# Altium PCB ATMEGA8高仿PLC控制板.PCBDOC (part 3 of 3)
Units mm, origin at the board's own origin, x right, y up, seen from the top; angles counter-clockwise.
Board outline 152.4 x 101.6 mm, 2 copper layers (Top Layer, Bottom Layer); 72 components, 81 nets, 279 pads, 77 vias.
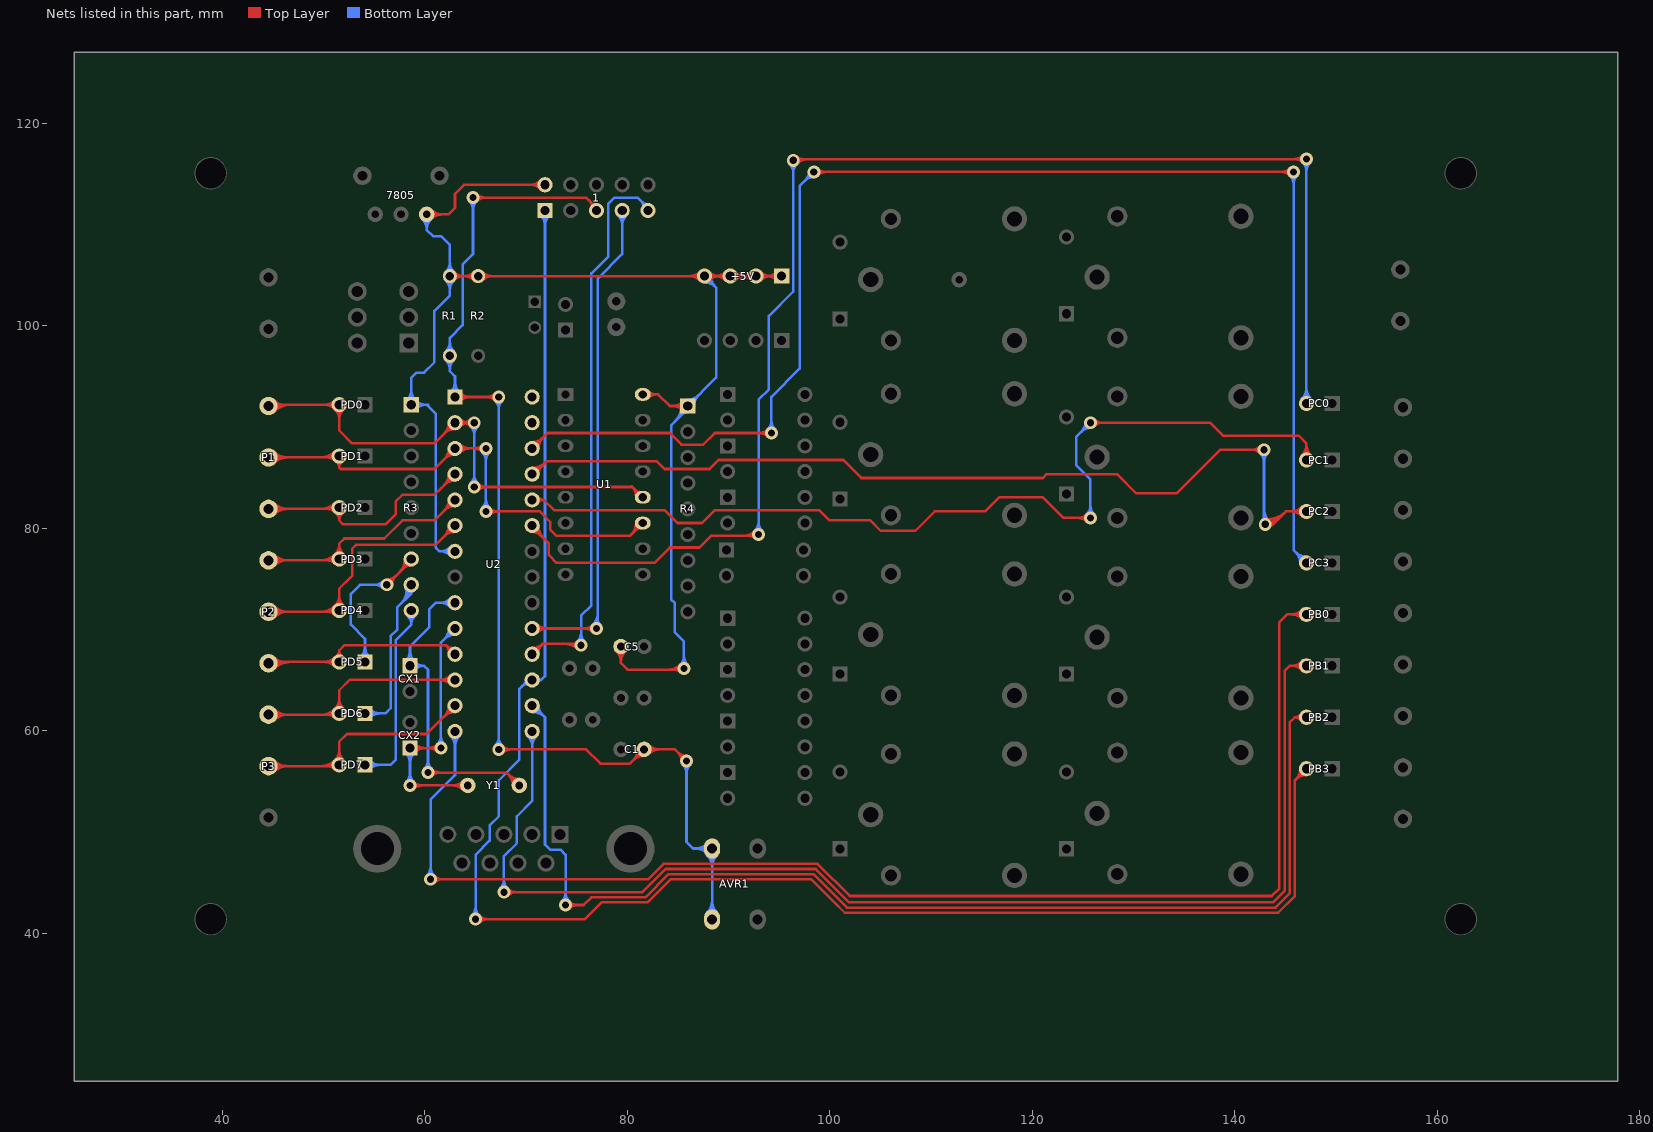
[diagram p3: the nets of this part, all layers, seen from the top]

## Via types
v1: diameter 1.27, hole 0.711, Top Layer to Bottom Layer, 77 vias

## Nets (pads, with @x,y where several pads share a name; then routed paths per layer and width w, separated by ;. In a path a pad name is that pad's centre, name@x,y a point inside that pad or via, vN(x,y) a via of type N, cw(c..) or ccw(c..) an arc to the next point about the centre after c; other vN are vias at no path point) (continued)
NetPD5_1: PD5.1 R3.7 | length 25.7
  Top Layer w0.254: v1(56.261,74.422) 58.674,76.835 R3.7@58.674,76.962 ; v1@56.261,74.93 ccw(c56.261,76.156) 57.128,75.289 ccw(c57.995,74.422) v1@56.769,74.422 ; 57.521,75.682 ccw(c56.24,76.962) R3.7@58.051,76.962 ; 57.827,75.988 cw(c58.674,75.142) R3.7@58.674,76.339 ; 57.954,76.115 ccw(c57.108,76.962) R3.7@58.305,76.962
  Bottom Layer w0.254: PD5.1@53.661,67.243 ccw(c52.598,68.306) 54.102,68.306 ccw(c55.606,68.306) PD5.1@54.543,67.243 ; PD5.1@53.841,67.063 ccw(c53.211,67.693) 54.102,67.693 ccw(c54.993,67.693) PD5.1@54.363,67.063 ; PD5.1@54.102,66.802 54.102,69.088 52.705,70.485 52.705,73.533 53.594,74.422 v1(56.261,74.422) ; v1@55.902,74.063 ccw(c55.035,73.196) 55.035,74.422 ccw(c55.035,75.648) v1@55.902,74.781
NetPD6_1: PD6.1 R3.8 | length 25.9
  Bottom Layer w0.254: PD6.1@54.102,61.722 56.134,61.722 56.642,62.23 56.642,69.342 57.277,69.977 57.277,72.18 58.674,73.577 ; PD6.1@54.363,61.461 cw(c54.993,60.831) 54.993,61.722 cw(c54.993,62.613) PD6.1@54.363,61.983 ; PD6.1@54.543,61.281 cw(c55.606,60.218) 55.606,61.722 cw(c55.606,63.226) PD6.1@54.543,62.163 ; 57.7,72.602 ccw(c56.578,73.724) R3.8@58.083,74.225 ; 57.99,72.893 ccw(c57.014,73.869) R3.8@58.324,74.305 ; 58.281,73.184 ccw(c57.45,74.014) R3.8@58.565,74.386 ; R3.8@58.49,73.827 cw(c58.412,73.577) 58.674,73.577 ; 58.572,73.474 ccw(c57.886,74.16) R3.8@58.806,74.466 ; R3.8@58.674,74.422 58.674,73.577 ; R3.8@58.858,73.827 ccw(c58.936,73.577) 58.674,73.577
NetPD7_1: PD7.1 R3.9 | length 25.7
  Bottom Layer w0.254: PD7.1@54.102,56.642 56.642,56.642 57.15,57.15 57.15,68.961 58.674,70.485 ; PD7.1@54.363,56.381 cw(c54.993,55.751) 54.993,56.642 cw(c54.993,57.533) PD7.1@54.363,56.903 ; PD7.1@54.543,56.201 cw(c55.606,55.138) 55.606,56.642 cw(c55.606,58.146) PD7.1@54.543,57.083 ; R3.9@58.258,71.418 cw(c57.419,70.485) 58.674,70.485 ; R3.9@58.427,71.607 cw(c57.931,71.055) 58.674,71.055 cw(c59.417,71.055) R3.9@58.921,71.607 ; R3.9@58.674,71.882 58.674,70.485 ; R3.9@59.09,71.418 ccw(c59.929,70.485) 58.674,70.485
PB0: PB0.2 U2.14 | length 142.3
  Top Layer w0.254: v1(60.579,45.339) 82.042,45.339 83.566,46.863 98.806,46.863 101.981,43.688 143.637,43.688 144.399,44.45 144.399,70.739 145.161,71.501 PB0.2@147.066,71.501 ; v1@60.938,44.98 cw(c61.805,44.113) 61.805,45.339 cw(c61.805,46.565) v1@60.938,45.698 ; PB0.2@146.625,71.06 ccw(c145.562,69.997) 145.562,71.501 ccw(c145.562,73.005) PB0.2@146.625,71.942 ; PB0.2@146.805,71.24 ccw(c146.175,70.61) 146.175,71.501 ccw(c146.175,72.392) PB0.2@146.805,71.762
  Bottom Layer w0.254: v1@60.22,45.698 ccw(c59.353,46.565) 60.579,46.565 ccw(c61.805,46.565) v1@60.938,45.698 ; v1(60.579,45.339) 60.579,53.213 62.992,55.626 U2.14@62.992,59.944 ; U2.14@62.551,59.503 cw(c61.488,58.44) 62.992,58.44 cw(c64.496,58.44) U2.14@63.433,59.503 ; U2.14@62.731,59.683 cw(c62.101,59.053) 62.992,59.053 cw(c63.883,59.053) U2.14@63.253,59.683
PB1: PB1.2 U2.15 | length 132.4
  Top Layer w0.254: v1(67.818,44.069) 81.49,44.069 83.776,46.355 98.596,46.355 101.898,43.053 143.764,43.053 144.907,44.196 144.907,65.913 145.415,66.421 PB1.2@147.066,66.421 ; v1@68.177,43.71 cw(c69.044,42.843) 69.044,44.069 cw(c69.044,45.295) v1@68.177,44.428 ; PB1.2@146.625,65.98 ccw(c145.562,64.917) 145.562,66.421 ccw(c145.562,67.925) PB1.2@146.625,66.862 ; PB1.2@146.805,66.16 ccw(c146.175,65.53) 146.175,66.421 ccw(c146.175,67.312) PB1.2@146.805,66.682
  Bottom Layer w0.254: v1@67.459,44.428 ccw(c66.592,45.295) 67.818,45.295 ccw(c69.044,45.295) v1@68.177,44.428 ; v1(67.818,44.069) 67.818,47.625 69.088,48.895 69.088,51.562 70.612,53.086 U2.15@70.612,59.944 ; U2.15@70.171,59.503 cw(c69.108,58.44) 70.612,58.44 cw(c72.116,58.44) U2.15@71.053,59.503 ; U2.15@70.351,59.683 cw(c69.721,59.053) 70.612,59.053 cw(c71.503,59.053) U2.15@70.873,59.683
PB2: PB2.2 U2.16 | length 123.8
  Top Layer w0.254: v1(73.914,42.799) 75.692,42.799 76.454,43.561 81.788,43.561 84.074,45.847 98.385,45.847 101.687,42.545 144.018,42.545 145.415,43.942 145.415,60.833 145.923,61.341 ; v1@74.273,42.44 cw(c75.14,41.573) 75.14,42.799 cw(c75.14,44.025) v1@74.273,43.158 ; PB2.2@146.542,61.003 ccw(c145.923,60.604) 145.923,61.341 ; PB2.2@146.542,61.679 cw(c145.923,62.078) 145.923,61.341 ; PB2.2@147.066,61.341 145.923,61.341
  Bottom Layer w0.254: U2.16@70.612,61.861 cw(c70.612,60.05) 71.892,61.331 ; U2.16@70.612,62.115 cw(c70.612,60.918) 71.459,61.764 ; U2.16@70.612,62.484 70.739,62.484 71.882,61.341 71.882,48.768 72.39,48.26 73.406,48.26 73.914,47.752 v1(73.914,42.799) ; U2.16@71.235,62.484 ccw(c72.432,62.484) 71.586,61.637 ; v1@73.555,43.158 ccw(c72.688,44.025) 73.914,44.025 ccw(c75.14,44.025) v1@74.273,43.158
PB3: 1.1 PB3.2 U2.17 | length 185.7
  Top Layer w0.254: v1(65.024,41.402) 75.819,41.402 77.47,43.053 81.998,43.053 84.284,45.339 98.171,45.339 100.457,43.053 100.461,43.053 101.477,42.037 144.272,42.037 145.923,43.688 145.923,55.118 PB3.2@147.066,56.261 ; v1@65.383,41.043 cw(c66.25,40.176) 66.25,41.402 cw(c66.25,42.628) v1@65.383,41.761 ; PB3.2@146.443,56.261 cw(c144.939,56.261) 146.002,55.197 cw(c147.066,54.134) PB3.2@147.066,55.638 ; PB3.2@146.697,56.261 cw(c145.806,56.261) 146.436,55.631 cw(c147.066,55.001) PB3.2@147.066,55.892
  Bottom Layer w0.254: v1@64.665,41.761 ccw(c63.798,42.628) 65.024,42.628 ccw(c66.25,42.628) v1@65.383,41.761 ; v1(65.024,41.402) 65.024,47.752 66.421,49.149 66.421,50.673 67.31,51.562 67.31,55.118 69.342,57.15 69.342,64.135 70.231,65.024 71.501,65.024 ; 69.513,64.306 cw(c70.392,63.427) U2.17@70.562,64.658 ; 69.818,64.611 ccw(c69.405,65.024) U2.17@69.989,65.024 ; 69.874,64.667 cw(c70.48,64.062) U2.17@70.596,64.91 ; U2.17@71.198,64.811 cw(c71.501,64.701) 71.501,65.024 ; U2.17@71.198,65.237 ccw(c71.501,65.347) 71.501,65.024 ; 1.1@71.441,110.938 cw(c70.378,109.875) 71.882,109.875 cw(c73.386,109.875) 1.1@72.323,110.938 ; 1.1@71.621,111.118 cw(c70.991,110.488) 71.882,110.488 cw(c72.773,110.488) 1.1@72.143,111.118 ; 1.1@71.882,111.379 71.882,65.405 71.501,65.024
PB4: 1.9 U2.18 | length 64.8
  Top Layer w0.254: U2.18@70.612,67.564 71.628,68.58 ; U2.18@70.624,67.933 ccw(c70.65,68.729) 71.214,68.166 ccw(c71.777,67.602) U2.18@70.981,67.576 ; U2.18@70.632,68.187 ccw(c70.677,69.531) 71.628,68.58 ; U2.18@71.235,67.584 cw(c72.579,67.629) 71.628,68.58 ; 73.905,68.58 cw(c73.905,66.92) v1@75.079,68.094 ; v1@75.079,68.812 cw(c74.518,69.373) 74.518,68.58 cw(c74.518,67.533) v1@75.258,68.273 ; v1(75.438,68.453) 75.311,68.58 71.628,68.58
  Bottom Layer w0.254: v1@75.079,68.812 ccw(c74.212,69.679) 75.438,69.679 ccw(c76.664,69.679) v1@75.797,68.812 ; v1(75.438,68.453) 75.438,71.374 76.454,72.39 76.454,105.156 78.105,106.807 78.105,112.014 78.74,112.649 81.026,112.649 82.042,111.633 1.9@82.042,111.379 ; 81.301,112.374 cw(c80.397,111.47) 1.9@81.674,111.399 ; 81.412,112.263 ccw(c82.042,112.893) 1.9@82.042,112.002
PB5: 1.7 U2.19 | length 61
  Top Layer w0.254: U2.19@70.612,70.104 v1(76.962,70.104) ; U2.19@70.873,69.843 cw(c71.503,69.213) 71.503,70.104 cw(c71.503,70.995) U2.19@70.873,70.365 ; U2.19@71.053,69.663 cw(c72.116,68.6) 72.116,70.104 cw(c72.116,71.608) U2.19@71.053,70.545 ; v1@76.603,69.745 ccw(c75.736,68.878) 75.736,70.104 ccw(c75.736,71.33) v1@76.603,70.463
  Bottom Layer w0.254: v1@76.603,70.463 ccw(c75.429,71.637) 77.089,71.637 ; v1@76.782,70.284 ccw(c76.042,71.024) 77.089,71.024 ccw(c77.882,71.024) v1@77.321,70.463 ; v1(76.962,70.104) 77.089,70.104 77.089,104.648 79.502,107.061 1.7@79.502,111.379 ; 1.7@79.061,110.938 cw(c77.998,109.875) 79.502,109.875 cw(c81.006,109.875) 1.7@79.943,110.938 ; 1.7@79.241,111.118 cw(c78.611,110.488) 79.502,110.488 cw(c80.393,110.488) 1.7@79.763,111.118
PB6: CX1.1 U2.9 Y1.2 | length 49.4
  Top Layer w0.254: v1(60.325,55.88) 68.072,55.88 Y1.2@69.342,54.61 ; v1@60.684,55.521 cw(c61.551,54.654) 61.551,55.88 cw(c61.551,57.106) v1@60.684,56.239 ; Y1.2@68.707,54.61 ccw(c67.174,54.61) 68.258,55.694 ccw(c69.342,56.778) Y1.2@69.342,55.245 ; Y1.2@68.961,54.61 ccw(c68.041,54.61) 68.692,55.26 ccw(c69.342,55.911) Y1.2@69.342,54.991
  Bottom Layer w0.254: CX1.1@58.106,66.862 ccw(c57.043,67.925) 58.547,67.925 ccw(c60.051,67.925) CX1.1@58.988,66.862 ; CX1.1@58.286,66.682 ccw(c57.656,67.312) 58.547,67.312 ccw(c59.438,67.312) CX1.1@58.808,66.682 ; CX1.1@58.822,66.174 cw(c59.374,65.678) 59.374,66.421 cw(c59.374,67.164) CX1.1@58.822,66.668 ; CX1.1@59.011,66.005 cw(c59.944,65.166) 59.944,66.421 ; CX1.1@59.011,66.837 ccw(c59.944,67.676) 59.944,66.421 ; v1@59.966,56.239 ccw(c59.099,57.106) 60.325,57.106 ccw(c61.551,57.106) v1@60.684,56.239 ; v1(60.325,55.88) 60.325,66.04 59.944,66.421 ; U2.9@62.551,72.203 ccw(c61.488,71.14) 61.488,72.644 ccw(c61.488,74.148) U2.9@62.551,73.085 ; U2.9@62.731,72.383 ccw(c62.101,71.753) 62.101,72.644 ccw(c62.101,73.535) U2.9@62.731,72.905 ; U2.9@62.992,72.644 61.087,72.644 60.452,72.009 60.452,70.231 58.547,68.326 CX1.1@58.547,66.421 59.944,66.421
PB7: CX2.1 U2.10 Y1.1 | length 47.7
  Top Layer w0.254: v1(58.547,54.61) 58.801,54.61 Y1.1@64.262,54.61 ; CX2.1@58.547,58.293 v1(61.595,58.293) ; CX2.1@58.808,58.032 cw(c59.438,57.402) 59.438,58.293 cw(c59.438,59.184) CX2.1@58.808,58.554 ; v1@58.906,54.251 cw(c59.773,53.384) 59.773,54.61 cw(c59.773,55.836) v1@58.906,54.969 ; CX2.1@58.988,57.852 cw(c60.051,56.789) 60.051,58.293 cw(c60.051,59.797) CX2.1@58.988,58.734 ; v1@61.236,57.934 ccw(c60.369,57.067) 60.369,58.293 ccw(c60.369,59.519) v1@61.236,58.652 ; Y1.1@63.813,54.161 ccw(c62.729,53.077) 62.729,54.61 ccw(c62.729,56.143) Y1.1@63.813,55.059 ; Y1.1@63.993,54.341 ccw(c63.342,53.69) 63.342,54.61 ccw(c63.342,55.53) Y1.1@63.993,54.879
  Bottom Layer w0.254: CX2.1@58.106,57.852 cw(c57.043,56.789) 58.547,56.789 cw(c60.051,56.789) CX2.1@58.988,57.852 ; v1@58.188,54.969 ccw(c57.321,55.836) 58.547,55.836 ccw(c59.773,55.836) v1@58.906,54.969 ; CX2.1@58.286,58.032 cw(c57.656,57.402) 58.547,57.402 cw(c59.438,57.402) CX2.1@58.808,58.032 ; v1(58.547,54.61) CX2.1@58.547,58.293 ; v1@61.236,58.652 ccw(c60.369,59.519) 61.595,59.519 ccw(c62.821,59.519) v1@61.954,58.652 ; v1(61.595,58.293) 61.595,68.707 U2.10@62.992,70.104 ; U2.10@62.369,70.104 cw(c60.865,70.104) 61.928,69.04 cw(c62.992,67.977) U2.10@62.992,69.481 ; U2.10@62.623,70.104 cw(c61.732,70.104) 62.362,69.474 cw(c62.992,68.844) U2.10@62.992,69.735
PC0: PC0.2 U2.23 | length 159.5
  Top Layer w0.254: U2.23@70.612,79.641 cw(c70.612,78.444) 71.459,79.29 ; U2.23@70.612,80.264 70.612,80.137 72.263,78.486 72.263,77.343 73.025,76.581 82.677,76.581 84.201,78.105 87.122,78.105 88.265,79.248 93.091,79.248 v1(92.964,79.375) ; U2.23@70.981,80.264 ccw(c72.178,80.264) 71.332,79.417 ; U2.23@71.235,80.264 ccw(c73.046,80.264) 71.765,78.984 ; 91.431,79.248 ccw(c91.431,80.908) v1@92.605,79.734 ; v1@92.605,79.016 ccw(c92.044,78.455) 92.044,79.248 ccw(c92.044,80.295) v1@92.784,79.555 ; v1(96.393,116.332) 96.52,116.459 v1(147.066,116.459) ; v1@96.573,116.152 cw(c97.313,115.412) 97.313,116.459 cw(c97.313,117.252) v1@96.752,116.691 ; v1@96.752,115.973 cw(c97.926,114.799) 97.926,116.459 ; v1@146.707,116.1 ccw(c145.84,115.233) 145.84,116.459 ccw(c145.84,117.685) v1@146.707,116.818
  Bottom Layer w0.254: v1@92.605,79.734 ccw(c91.738,80.601) 92.964,80.601 ccw(c94.19,80.601) v1@93.323,79.734 ; v1(92.964,79.375) 92.964,92.71 93.98,93.726 93.98,100.965 96.393,103.378 v1(96.393,116.332) ; v1@96.034,115.973 cw(c95.167,115.106) 96.393,115.106 cw(c97.619,115.106) v1@96.752,115.973 ; PC0.2@146.625,92.77 ccw(c145.562,93.833) 147.066,93.833 ccw(c148.57,93.833) PC0.2@147.507,92.77 ; v1@146.707,116.1 cw(c145.84,115.233) 147.066,115.233 cw(c148.292,115.233) v1@147.425,116.1 ; PC0.2@146.805,92.59 ccw(c146.175,93.22) 147.066,93.22 ccw(c147.957,93.22) PC0.2@147.327,92.59 ; PC0.2@147.066,92.329 147.066,116.078 v1(147.066,116.459)
PC1: PC1.2 U2.24 | length 107
  Top Layer w0.254: U2.24@70.612,82.804 71.755,82.804 ; U2.24@71.136,82.466 cw(c71.755,82.067) 71.755,82.804 ; U2.24@71.136,83.142 ccw(c71.755,83.541) 71.755,82.804 ; v1@125.371,80.667 ccw(c124.504,79.8) 124.504,81.026 ccw(c124.504,82.252) v1@125.371,81.385 ; v1(125.73,81.026) 123.063,81.026 121.031,83.058 116.713,83.058 115.316,81.661 110.363,81.661 108.458,79.756 105.029,79.756 104.013,80.772 99.949,80.772 98.933,81.788 88.646,81.788 87.376,80.518 84.963,80.518 83.693,81.788 72.771,81.788 71.755,82.804 ; v1(125.73,90.424) 137.541,90.424 138.811,89.154 146.304,89.154 147.066,88.392 PC1.2@147.066,86.741 ; v1@126.089,90.065 cw(c126.956,89.198) 126.956,90.424 cw(c126.956,91.65) v1@126.089,90.783 ; PC1.2@146.625,87.182 ccw(c145.562,88.245) 147.066,88.245 ccw(c148.57,88.245) PC1.2@147.507,87.182 ; PC1.2@146.805,87.002 ccw(c146.175,87.632) 147.066,87.632 ccw(c147.957,87.632) PC1.2@147.327,87.002
  Bottom Layer w0.254: v1@125.222,90.424 cw(c123.996,90.424) 124.863,89.557 cw(c125.73,88.69) v1@125.73,89.916 ; v1@125.371,81.385 ccw(c124.504,82.252) 125.73,82.252 ccw(c126.956,82.252) v1@126.089,81.385 ; v1(125.73,81.026) 125.73,84.836 124.333,86.233 124.333,89.027 v1(125.73,90.424)
PC2: PC2.2 U2.25 | length 109.6
  Top Layer w0.254: U2.25@70.612,85.344 70.739,85.344 72.009,86.614 82.931,86.614 83.693,85.852 88.138,85.852 89.027,86.741 101.346,86.741 103.124,84.963 121.031,84.963 121.412,85.344 128.353,85.344 130.258,83.439 134.239,83.439 138.557,87.757 v1(142.875,87.757) ; U2.25@70.612,85.713 ccw(c70.612,86.91) 71.459,86.064 ; U2.25@70.612,85.967 ccw(c70.612,87.778) 71.892,86.497 ; U2.25@71.235,85.344 cw(c72.432,85.344) 71.586,86.191 ; v1@142.516,87.398 ccw(c141.649,86.531) 141.649,87.757 ccw(c141.649,88.983) v1@142.516,88.116 ; v1@142.987,80.137 ccw(c143.051,81.24) 143.832,80.459 ; v1@143.017,80.645 ccw(c143.138,82.755) 144.633,81.26 ; v1@143.031,80.898 ccw(c143.182,83.513) 145.034,81.661 ; v1@143.471,80.196 cw(c143.764,80.074) 143.764,80.391 ; v1@143.471,80.586 ccw(c143.764,80.708) 143.764,80.391 ; 144.233,80.86 cw(c143.095,81.998) v1(143.002,80.391) 143.764,80.391 ; PC2.2@146.625,81.22 ccw(c145.562,80.157) 145.562,81.661 ccw(c145.562,83.165) PC2.2@146.625,82.102 ; PC2.2@146.805,81.4 ccw(c146.175,80.77) 146.175,81.661 ccw(c146.175,82.552) PC2.2@146.805,81.922 ; PC2.2@147.066,81.661 145.034,81.661 ; 143.764,80.391 145.034,81.661
  Bottom Layer w0.254: v1@142.516,87.398 cw(c141.649,86.531) 142.875,86.531 cw(c144.101,86.531) v1@143.234,87.398 ; v1@142.643,80.75 ccw(c142.082,81.311) 142.875,81.311 ccw(c143.922,81.311) v1@143.182,80.571 ; 142.875,81.924 ccw(c144.535,81.924) v1@143.361,80.75 ; v1(142.875,87.757) 142.875,80.518 v1(143.002,80.391)
PC3: PC3.2 U2.26 | length 158.3
  Top Layer w0.254: U2.26@70.612,87.884 72.136,89.408 84.201,89.408 85.344,88.265 87.503,88.265 88.646,89.408 v1(94.234,89.408) ; U2.26@70.612,88.253 ccw(c70.612,89.144) 71.242,88.514 ccw(c71.872,87.884) U2.26@70.981,87.884 ; U2.26@70.612,88.507 ccw(c70.612,90.011) 71.676,88.948 ccw(c72.739,87.884) U2.26@71.235,87.884 ; v1@93.875,89.049 ccw(c93.008,88.182) 93.008,89.408 ccw(c93.008,90.634) v1@93.875,89.767 ; v1(98.425,115.189) v1(145.796,115.189) ; v1@98.784,114.83 cw(c99.651,113.963) 99.651,115.189 cw(c99.651,116.415) v1@98.784,115.548 ; v1@145.437,114.83 ccw(c144.57,113.963) 144.57,115.189 ccw(c144.57,116.415) v1@145.437,115.548
  Bottom Layer w0.254: v1@93.875,89.767 ccw(c93.008,90.634) 94.234,90.634 ccw(c95.46,90.634) v1@94.593,89.767 ; v1(94.234,89.408) 94.234,92.964 97.028,95.758 97.028,113.792 v1(98.425,115.189) ; v1@97.917,115.189 cw(c96.691,115.189) 97.558,114.322 cw(c98.425,113.455) v1@98.425,114.681 ; v1@145.437,114.83 cw(c144.57,113.963) 145.796,113.963 cw(c147.022,113.963) v1@146.155,114.83 ; v1(145.796,115.189) 145.796,77.851 PC3.2@147.066,76.581 ; PC3.2@146.443,76.581 ccw(c144.939,76.581) 146.002,77.645 ccw(c147.066,78.708) PC3.2@147.066,77.204 ; PC3.2@146.697,76.581 ccw(c145.806,76.581) 146.436,77.211 ccw(c147.066,77.841) PC3.2@147.066,76.95
PC4: U2.27
PC5: U2.28
PC6: 1.5 AVR1.1 C1.1 R1.1 U2.1 | length 162.4
  Top Layer w0.254: U2.1@62.992,92.964 v1(67.31,92.964) ; U2.1@63.253,92.703 cw(c63.883,92.073) 63.883,92.964 cw(c63.883,93.855) U2.1@63.253,93.225 ; U2.1@63.433,92.523 cw(c64.496,91.46) 64.496,92.964 cw(c64.496,94.468) U2.1@63.433,93.405 ; v1(64.77,112.649) 75.946,112.649 76.962,111.633 1.5@76.962,111.379 ; v1@65.129,112.29 cw(c65.996,111.423) 65.996,112.649 cw(c65.996,113.875) v1@65.129,113.008 ; v1@66.951,92.605 ccw(c66.084,91.738) 66.084,92.964 ccw(c66.084,94.19) v1@66.951,93.323 ; v1(67.31,58.166) 75.946,58.166 77.343,56.769 80.264,56.769 C1.1@81.661,58.166 84.709,58.166 v1(85.852,57.023) ; v1@67.669,57.807 cw(c68.536,56.94) 68.536,58.166 cw(c68.536,59.392) v1@67.669,58.525 ; 76.221,112.374 cw(c75.317,111.47) 1.5@76.594,111.399 ; 76.332,112.263 ccw(c76.962,112.893) 1.5@76.962,112.002 ; C1.1@81.026,58.166 cw(c79.493,58.166) 80.577,57.082 cw(c81.661,55.998) C1.1@81.661,57.531 ; C1.1@81.28,58.166 cw(c80.36,58.166) 81.011,57.516 cw(c81.661,56.865) C1.1@81.661,57.785 ; C1.1@81.93,57.897 cw(c82.581,57.246) 82.581,58.166 cw(c82.581,59.086) C1.1@81.93,58.435 ; C1.1@82.11,57.717 cw(c83.194,56.633) 83.194,58.166 cw(c83.194,59.699) C1.1@82.11,58.615 ; v1@85.344,57.023 ccw(c84.118,57.023) 84.985,57.89 ccw(c85.852,58.757) v1@85.852,57.531
  Bottom Layer w0.254: R1.1@62.079,96.623 cw(c61.101,95.645) 62.484,95.645 cw(c63.867,95.645) R1.1@62.889,96.623 ; R1.1@62.079,97.433 ccw(c61.101,98.411) 62.484,98.411 ccw(c63.867,98.411) R1.1@62.889,97.433 ; R1.1@62.258,96.802 cw(c61.714,96.258) 62.484,96.258 cw(c63.254,96.258) R1.1@62.71,96.802 ; R1.1@62.258,97.254 ccw(c61.714,97.798) 62.484,97.798 ccw(c63.254,97.798) R1.1@62.71,97.254 ; U2.1@62.551,93.405 ccw(c61.488,94.468) 62.992,94.468 ccw(c64.496,94.468) U2.1@63.433,93.405 ; U2.1@62.731,93.225 ccw(c62.101,93.855) 62.992,93.855 ccw(c63.883,93.855) U2.1@63.253,93.225 ; U2.1@62.992,92.964 62.992,94.996 62.484,95.504 62.484,98.806 63.754,100.076 63.754,106.045 64.77,107.061 v1(64.77,112.649) ; v1@64.411,112.29 cw(c63.544,111.423) 64.77,111.423 cw(c65.996,111.423) v1@65.129,112.29 ; v1@66.951,58.525 ccw(c66.084,59.392) 67.31,59.392 ccw(c68.536,59.392) v1@67.669,58.525 ; v1@66.951,92.605 cw(c66.084,91.738) 67.31,91.738 cw(c68.536,91.738) v1@67.669,92.605 ; v1(67.31,58.166) v1(67.31,92.964) ; v1@85.493,56.664 cw(c84.626,55.797) 85.852,55.797 cw(c87.078,55.797) v1@86.211,56.664 ; v1(85.852,57.023) 85.852,49.022 86.495,48.379 AVR1.1@88.377,48.379 AVR1.1@88.377,41.379 ; AVR1.1@87.901,42.055 ccw(c86.752,43.204) 88.377,43.204 ccw(c90.002,43.204) AVR1.1@88.853,42.055 ; AVR1.1@87.901,47.703 cw(c86.752,46.554) 88.377,46.554 cw(c90.002,46.554) AVR1.1@88.853,47.703 ; AVR1.1@87.901,47.903 ccw(c86.752,46.754) 86.752,48.379 ccw(c86.752,50.004) AVR1.1@87.901,48.855 ; AVR1.1@88.081,41.875 ccw(c87.366,42.591) 88.377,42.591 ccw(c89.389,42.591) AVR1.1@88.673,41.875 ; AVR1.1@88.081,47.883 cw(c87.366,47.167) 88.377,47.167 cw(c89.389,47.167) AVR1.1@88.673,47.883 ; AVR1.1@88.081,48.083 ccw(c87.366,47.367) 87.366,48.379 ccw(c87.366,49.391) AVR1.1@88.081,48.675
PD0: P1.1 PD0.2 U1.12 U2.2 | length 78.9
  Top Layer w0.254: P1.1@44.577,92.075 44.704,92.202 PD0.2@51.562,92.202 51.562,89.662 52.832,88.392 60.96,88.392 U2.2@62.992,90.424 v1(64.897,90.424) ; P1.1@44.773,91.879 cw(c45.552,91.1) 45.552,92.202 cw(c45.552,93.05) P1.1@44.952,92.45 ; P1.1@44.952,91.7 cw(c46.166,90.486) 46.166,92.202 cw(c46.166,93.664) P1.1@45.132,92.63 ; P1.1@45.132,91.52 cw(c46.779,89.873) 46.779,92.202 ; PD0.2@51.121,92.643 cw(c50.058,93.706) 50.058,92.202 cw(c50.058,90.698) 51.121,91.761 cw(c50.058,90.698) 51.562,90.698 cw(c53.066,90.698) PD0.2@52.003,91.761 ; PD0.2@51.301,92.463 cw(c50.671,93.093) 50.671,92.202 cw(c50.671,91.311) 51.301,91.941 cw(c50.671,91.311) 51.562,91.311 cw(c52.453,91.311) PD0.2@51.823,91.941 ; U2.2@62.369,90.424 cw(c60.865,90.424) 61.928,89.36 cw(c62.992,88.297) U2.2@62.992,89.801 ; U2.2@62.623,90.424 cw(c61.732,90.424) 62.362,89.794 cw(c62.992,89.164) U2.2@62.992,90.055 ; U2.2@63.253,90.163 cw(c63.883,89.533) 63.883,90.424 cw(c63.883,91.315) U2.2@63.253,90.685 ; U2.2@63.433,89.983 cw(c64.496,88.92) 64.496,90.424 cw(c64.496,91.928) U2.2@63.433,90.865 ; v1@64.538,90.065 ccw(c63.671,89.198) 63.671,90.424 ccw(c63.671,91.65) v1@64.538,90.783 ; v1(64.897,84.074) 80.513,84.074 U1.12@81.53,83.057 ; v1@65.256,83.715 cw(c66.123,82.848) 66.123,84.074 cw(c66.123,85.3) v1@65.256,84.433 ; 80.432,84.155 cw(c79.374,83.097) U1.12@80.87,83.067 ; 80.795,83.792 ccw(c81.368,84.365) U1.12@81.368,83.555 ; 80.854,83.734 cw(c80.201,83.081) U1.12@81.124,83.062
  Bottom Layer w0.254: v1@64.538,84.433 ccw(c63.671,85.3) 64.897,85.3 ccw(c66.123,85.3) v1@65.256,84.433 ; v1@64.538,90.065 cw(c63.671,89.198) 64.897,89.198 cw(c66.123,89.198) v1@65.256,90.065 ; v1(64.897,84.074) v1(64.897,90.424)
PD1: P1.2 PD1.2 U1.11 U2.3 | length 75
  Top Layer w0.254: P1.2@44.577,86.995 51.435,86.995 PD1.2@51.562,87.122 51.562,85.979 ; P1.2@44.952,86.62 cw(c45.859,85.713) 45.859,86.995 cw(c45.859,88.277) P1.2@44.952,87.37 ; P1.2@45.132,86.44 cw(c46.472,85.1) 46.472,86.995 cw(c46.472,88.89) P1.2@45.132,87.55 ; 49.751,86.995 ccw(c49.751,88.933) PD1.2@51.121,87.563 ; PD1.2@51.121,86.681 ccw(c50.365,85.925) 50.365,86.995 ccw(c50.365,88.319) PD1.2@51.301,87.383 ; PD1.2@51.224,86.598 cw(c50.825,85.979) 51.562,85.979 ; PD1.2@51.9,86.598 ccw(c52.299,85.979) 51.562,85.979 ; U2.3@62.369,87.884 cw(c60.865,87.884) 61.928,86.82 cw(c62.992,85.757) U2.3@62.992,87.261 ; U2.3@62.623,87.884 cw(c61.732,87.884) 62.362,87.254 cw(c62.992,86.624) U2.3@62.992,87.515 ; U2.3@63.253,87.623 cw(c63.883,86.993) 63.883,87.884 cw(c63.883,88.775) U2.3@63.253,88.145 ; U2.3@63.433,87.443 cw(c64.496,86.38) 64.496,87.884 cw(c64.496,89.388) U2.3@63.433,88.325 ; v1@65.681,87.525 ccw(c64.814,86.658) 64.814,87.884 ccw(c64.814,89.11) v1@65.681,88.243 ; v1(66.04,81.661) 71.374,81.661 72.39,80.645 72.39,79.883 73.025,79.248 80.261,79.248 U1.11@81.53,80.517 U1.11@81.53,80.522 ; v1(66.04,87.884) U2.3@62.992,87.884 60.96,85.852 51.689,85.852 51.562,85.979 ; v1@66.399,81.302 cw(c67.266,80.435) 67.266,81.661 cw(c67.266,82.887) v1@66.399,82.02 ; 80.403,79.39 ccw(c79.275,80.517) U1.11@80.87,80.517 ; 80.795,79.782 cw(c81.368,79.209) U1.11@81.368,80.019 ; 80.836,79.823 ccw(c80.143,80.517) U1.11@81.124,80.517
  Bottom Layer w0.254: v1@65.681,82.02 ccw(c64.814,82.887) 66.04,82.887 ccw(c67.266,82.887) v1@66.399,82.02 ; v1@65.681,87.525 cw(c64.814,86.658) 66.04,86.658 cw(c67.266,86.658) v1@66.399,87.525 ; v1(66.04,81.661) v1(66.04,87.884)
PD2: P1.3 PD2.2 U2.4 | length 37.7
  Top Layer w0.254: P1.3@44.577,81.915 51.435,81.915 PD2.2@51.562,82.042 51.562,80.772 ; P1.3@44.952,81.54 cw(c45.859,80.633) 45.859,81.915 cw(c45.859,83.197) P1.3@44.952,82.29 ; P1.3@45.132,81.36 cw(c46.472,80.02) 46.472,81.915 cw(c46.472,83.81) P1.3@45.132,82.47 ; 49.751,81.915 ccw(c49.751,83.853) PD2.2@51.121,82.483 ; PD2.2@51.121,81.601 ccw(c50.365,80.845) 50.365,81.915 ccw(c50.365,83.239) PD2.2@51.301,82.303 ; PD2.2@51.181,81.549 cw(c50.579,80.772) 51.562,80.772 ; PD2.2@51.336,81.75 cw(c50.98,81.29) 51.562,81.29 cw(c52.144,81.29) PD2.2@51.788,81.75 ; PD2.2@51.943,81.549 ccw(c52.545,80.772) 51.562,80.772 ; U2.4@62.369,85.344 cw(c60.865,85.344) 61.928,84.28 cw(c62.992,83.217) U2.4@62.992,84.721 ; U2.4@62.623,85.344 cw(c61.732,85.344) 62.362,84.714 cw(c62.992,84.084) U2.4@62.992,84.975 ; U2.4@62.992,85.344 61.595,83.947 60.96,83.312 57.785,83.312 57.15,82.677 57.15,81.407 56.134,80.391 51.943,80.391 51.562,80.772
PD3: P2.1 PD3.2 U2.5 | length 37.7
  Top Layer w0.254: P2.1@44.577,76.835 51.435,76.835 PD3.2@51.562,76.962 51.562,78.486 52.07,78.994 56.007,78.994 57.785,80.772 60.96,80.772 U2.5@62.992,82.804 ; P2.1@44.952,76.46 cw(c45.859,75.553) 45.859,76.835 cw(c45.859,78.117) P2.1@44.952,77.21 ; P2.1@45.132,76.28 cw(c46.472,74.94) 46.472,76.835 cw(c46.472,78.73) P2.1@45.132,77.39 ; 49.751,76.835 ccw(c49.751,78.773) 51.121,77.403 ccw(c50.058,78.466) 51.562,78.466 ccw(c53.066,78.466) PD3.2@52.003,77.403 ; PD3.2@51.121,76.521 ccw(c50.365,75.765) 50.365,76.835 ccw(c50.365,78.159) 51.301,77.223 ccw(c50.671,77.853) 51.562,77.853 ccw(c52.453,77.853) PD3.2@51.823,77.223 ; U2.5@62.369,82.804 cw(c60.865,82.804) 61.928,81.74 cw(c62.992,80.677) U2.5@62.992,82.181 ; U2.5@62.623,82.804 cw(c61.732,82.804) 62.362,82.174 cw(c62.992,81.544) U2.5@62.992,82.435
PD4: P2.2 PD4.2 U2.6 | length 40.7
  Top Layer w0.254: P2.2@44.577,71.755 51.435,71.755 PD4.2@51.562,71.882 51.562,74.041 52.832,75.311 52.832,77.978 53.213,78.359 61.087,78.359 U2.6@62.992,80.264 ; P2.2@44.952,71.38 cw(c45.859,70.473) 45.859,71.755 cw(c45.859,73.037) P2.2@44.952,72.13 ; P2.2@45.132,71.2 cw(c46.472,69.86) 46.472,71.755 cw(c46.472,73.65) P2.2@45.132,72.31 ; 49.751,71.755 ccw(c49.751,73.693) 51.121,72.323 ccw(c50.058,73.386) 51.562,73.386 ccw(c53.066,73.386) PD4.2@52.003,72.323 ; PD4.2@51.121,71.441 ccw(c50.365,70.685) 50.365,71.755 ccw(c50.365,73.079) 51.301,72.143 ccw(c50.671,72.773) 51.562,72.773 ccw(c52.453,72.773) PD4.2@51.823,72.143 ; U2.6@62.369,80.264 cw(c60.865,80.264) 61.928,79.2 cw(c62.992,78.137) U2.6@62.992,79.641 ; U2.6@62.623,80.264 cw(c61.732,80.264) 62.362,79.634 cw(c62.992,79.004) U2.6@62.992,79.895
PD5: P2.3 PD5.2 U2.11 | length 33
  Top Layer w0.254: P2.3@44.577,66.675 44.704,66.802 PD5.2@51.562,66.802 51.562,67.945 ; P2.3@44.773,66.479 cw(c45.552,65.7) 45.552,66.802 cw(c45.552,67.65) P2.3@44.952,67.05 ; P2.3@44.952,66.3 cw(c46.166,65.086) 46.166,66.802 cw(c46.166,68.264) P2.3@45.132,67.23 ; P2.3@45.132,66.12 cw(c46.779,64.473) 46.779,66.802 ; PD5.2@51.121,66.361 ccw(c50.058,65.298) 50.058,66.802 ccw(c50.058,68.306) PD5.2@51.121,67.243 ; PD5.2@51.224,67.326 ccw(c50.825,67.945) 51.562,67.945 ; PD5.2@51.301,66.541 ccw(c50.671,65.911) 50.671,66.802 ccw(c50.671,67.693) PD5.2@51.301,67.063 ; PD5.2@51.9,67.326 cw(c52.299,67.945) 51.562,67.945 ; U2.11@62.375,67.648 ccw(c61.426,67.776) 62.103,68.453 ; U2.11@62.908,68.181 cw(c62.78,69.13) 62.103,68.453 ; U2.11@62.992,67.564 62.103,68.453 ; 51.562,67.945 52.07,68.453 62.103,68.453
PD6: P3.1 PD6.2 U2.12 | length 37.1
  Top Layer w0.254: P3.1@44.577,61.595 51.435,61.595 PD6.2@51.562,61.722 51.562,64.008 52.578,65.024 U2.12@62.992,65.024 ; P3.1@44.952,61.22 cw(c45.859,60.313) 45.859,61.595 cw(c45.859,62.877) P3.1@44.952,61.97 ; P3.1@45.132,61.04 cw(c46.472,59.7) 46.472,61.595 cw(c46.472,63.49) P3.1@45.132,62.15 ; 49.751,61.595 ccw(c49.751,63.533) 51.121,62.163 ccw(c50.058,63.226) 51.562,63.226 ccw(c53.066,63.226) PD6.2@52.003,62.163 ; PD6.2@51.121,61.281 ccw(c50.365,60.525) 50.365,61.595 ccw(c50.365,62.919) 51.301,61.983 ccw(c50.671,62.613) 51.562,62.613 ccw(c52.453,62.613) PD6.2@51.823,61.983 ; U2.12@62.551,64.583 ccw(c61.488,63.52) 61.488,65.024 ccw(c61.488,66.528) U2.12@62.551,65.465 ; U2.12@62.731,64.763 ccw(c62.101,64.133) 62.101,65.024 ccw(c62.101,65.915) U2.12@62.731,65.285
PD7: P3.2 PD7.2 U2.13 | length 38.1
  Top Layer w0.254: P3.2@44.577,56.515 51.435,56.515 PD7.2@51.562,56.642 51.562,58.928 52.324,59.69 60.198,59.69 U2.13@62.992,62.484 ; P3.2@44.952,56.14 cw(c45.859,55.233) 45.859,56.515 cw(c45.859,57.797) P3.2@44.952,56.89 ; P3.2@45.132,55.96 cw(c46.472,54.62) 46.472,56.515 cw(c46.472,58.41) P3.2@45.132,57.07 ; 49.751,56.515 ccw(c49.751,58.453) 51.121,57.083 ccw(c50.058,58.146) 51.562,58.146 ccw(c53.066,58.146) PD7.2@52.003,57.083 ; PD7.2@51.121,56.201 ccw(c50.365,55.445) 50.365,56.515 ccw(c50.365,57.839) 51.301,56.903 ccw(c50.671,57.533) 51.562,57.533 ccw(c52.453,57.533) PD7.2@51.823,56.903 ; U2.13@62.369,62.484 cw(c60.865,62.484) 61.928,61.42 cw(c62.992,60.357) U2.13@62.992,61.861 ; U2.13@62.623,62.484 cw(c61.732,62.484) 62.362,61.854 cw(c62.992,61.224) U2.13@62.992,62.115
VCC: 1.2 7805.2 +5V.1 +5V.2 +5V.3 +5V.4 C5.2 R1.2 R2.1 R3.1 R4.1 U1.16 U2.7 | length 232.9
  Top Layer w0.254: 7805.2@60.198,110.998 62.357,110.998 62.992,111.633 62.992,113.03 63.881,113.919 1.2@71.882,113.919 ; 7805.2@60.467,110.729 cw(c61.118,110.078) 61.118,110.998 cw(c61.118,111.918) 7805.2@60.467,111.267 ; 7805.2@60.647,110.549 cw(c61.731,109.465) 61.731,110.998 cw(c61.731,112.531) 7805.2@60.647,111.447 ; R1.2@62.484,104.902 94.996,104.902 +5V.1@95.25,104.648 ; R1.2@62.71,104.676 cw(c63.254,104.132) 63.254,104.902 cw(c63.254,105.672) R1.2@62.71,105.128 ; R1.2@62.889,104.497 cw(c63.867,103.519) 63.867,104.902 cw(c63.867,106.285) R1.2@62.889,105.307 ; R2.1@64.873,104.497 ccw(c63.895,103.519) 63.895,104.902 ccw(c63.895,106.285) R2.1@64.873,105.307 ; R2.1@65.052,104.676 ccw(c64.508,104.132) 64.508,104.902 ccw(c64.508,105.672) R2.1@65.052,105.128 ; R2.1@65.504,104.676 cw(c66.048,104.132) 66.048,104.902 cw(c66.048,105.672) R2.1@65.504,105.128 ; R2.1@65.683,104.497 cw(c66.661,103.519) 66.661,104.902 cw(c66.661,106.285) R2.1@65.683,105.307 ; 1.2@71.441,113.478 ccw(c70.378,112.415) 70.378,113.919 ccw(c70.378,115.423) 1.2@71.441,114.36 ; 1.2@71.621,113.658 ccw(c70.991,113.028) 70.991,113.919 ccw(c70.991,114.81) 1.2@71.621,114.18 ; C5.2@78.926,67.877 cw(c77.842,66.793) 79.375,66.793 cw(c80.908,66.793) C5.2@79.824,67.877 ; C5.2@79.106,68.057 cw(c78.455,67.406) 79.375,67.406 cw(c80.295,67.406) C5.2@79.644,68.057 ; C5.2@79.375,68.326 79.375,66.675 80.01,66.04 85.471,66.04 v1(85.598,66.167) ; U1.16@81.53,93.217 83.059,93.217 84.201,92.075 R4.1@85.979,92.075 ; U1.16@82.045,92.865 cw(c82.895,92.015) 82.895,93.217 cw(c82.895,94.419) U1.16@82.045,93.569 ; 84.065,66.04 ccw(c84.065,67.7) v1@85.239,66.526 ; v1@85.239,65.808 ccw(c84.678,65.247) 84.678,66.04 ccw(c84.678,67.087) v1@85.418,66.347 ; R4.1@85.538,91.634 ccw(c84.475,90.571) 84.475,92.075 ccw(c84.475,93.579) R4.1@85.538,92.516 ; R4.1@85.718,91.814 ccw(c85.088,91.184) 85.088,92.075 ccw(c85.088,92.966) R4.1@85.718,92.336 ; +5V.4@87.189,104.461 ccw(c86.126,103.398) 86.126,104.902 ccw(c86.126,106.406) +5V.4@87.189,105.343 ; +5V.4@87.369,104.641 ccw(c86.739,104.011) 86.739,104.902 ccw(c86.739,105.793) +5V.4@87.369,105.163 ; +5V.4@87.891,104.641 cw(c88.521,104.011) 88.521,104.902 cw(c88.521,105.793) +5V.4@87.891,105.163 ; +5V.4@88.071,104.461 cw(c89.134,103.398) 89.134,104.902 cw(c89.134,106.406) +5V.4@88.071,105.343 ; +5V.3@89.729,104.461 ccw(c88.666,103.398) 88.666,104.902 ccw(c88.666,106.406) +5V.3@89.729,105.343 ; +5V.3@89.909,104.641 ccw(c89.279,104.011) 89.279,104.902 ccw(c89.279,105.793) +5V.3@89.909,105.163 ; +5V.3@90.431,104.641 cw(c91.061,104.011) 91.061,104.902 cw(c91.061,105.793) +5V.3@90.431,105.163 ; +5V.3@90.611,104.461 cw(c91.674,103.398) 91.674,104.902 cw(c91.674,106.406) +5V.3@90.611,105.343 ; +5V.2@92.269,104.461 ccw(c91.206,103.398) 91.206,104.902 ccw(c91.206,106.406) +5V.2@92.269,105.343 ; +5V.2@92.449,104.641 ccw(c91.819,104.011) 91.819,104.902 ccw(c91.819,105.793) +5V.2@92.449,105.163 ; +5V.2@92.971,104.641 cw(c93.601,104.011) 93.601,104.902 cw(c93.601,105.793) +5V.2@92.971,105.163 ; +5V.2@93.151,104.461 cw(c94.214,103.398) 94.214,104.902 cw(c94.214,106.406) +5V.2@93.151,105.343 ; +5V.1@94.809,104.461 ccw(c93.746,103.398) 93.746,104.902 ccw(c93.746,106.406) +5V.1@94.809,105.343 ; +5V.1@94.989,104.641 ccw(c94.359,104.011) 94.359,104.902 ccw(c94.359,105.793) +5V.1@94.989,105.163
  Bottom Layer w0.254: R3.1@58.233,92.643 ccw(c57.17,93.706) 58.674,93.706 ccw(c60.178,93.706) 59.115,92.643 ccw(c60.178,93.706) 60.178,92.202 ccw(c60.178,90.698) R3.1@59.115,91.761 ; R3.1@58.413,92.463 ccw(c57.783,93.093) 58.674,93.093 ccw(c59.565,93.093) 58.935,92.463 ccw(c59.565,93.093) 59.565,92.202 ccw(c59.565,91.311) R3.1@58.935,91.941 ; 7805.2@59.751,110.547 cw(c58.687,109.474) 60.198,109.474 ; 7805.2@59.93,110.727 cw(c59.291,110.084) 60.198,110.084 cw(c61.105,110.084) 7805.2@60.466,110.727 ; 60.198,92.202 61.087,91.313 61.087,78.105 61.468,77.724 U2.7@62.992,77.724 ; 7805.2@60.198,110.998 60.198,109.474 ; 60.325,92.202 R3.1@58.674,92.202 58.674,94.869 59.182,95.377 59.944,95.377 60.96,96.393 60.96,101.473 62.484,102.997 62.484,107.95 61.595,108.839 60.833,108.839 60.198,109.474 ; 7805.2@60.645,110.547 ccw(c61.709,109.474) 60.198,109.474 ; R1.2@62.079,104.497 cw(c61.101,103.519) 62.484,103.519 cw(c63.867,103.519) R1.2@62.889,104.497 ; R1.2@62.079,105.307 ccw(c61.101,106.285) 62.484,106.285 ccw(c63.867,106.285) R1.2@62.889,105.307 ; R1.2@62.258,104.676 cw(c61.714,104.132) 62.484,104.132 cw(c63.254,104.132) R1.2@62.71,104.676 ; R1.2@62.258,105.128 ccw(c61.714,105.672) 62.484,105.672 ccw(c63.254,105.672) R1.2@62.71,105.128 ; U2.7@62.551,77.283 ccw(c61.488,76.22) 61.488,77.724 ccw(c61.488,79.228) U2.7@62.551,78.165 ; U2.7@62.731,77.463 ccw(c62.101,76.833) 62.101,77.724 ccw(c62.101,78.615) U2.7@62.731,77.985 ; 84.736,90.578 ccw(c83.239,92.075) R4.1@85.356,92.075 ; 85.169,91.011 ccw(c84.106,92.075) R4.1@85.61,92.075 ; v1@85.239,66.526 ccw(c84.372,67.393) 85.598,67.393 ccw(c86.824,67.393) v1@85.957,66.526 ; 85.349,91.191 cw(c85.979,90.561) R4.1@85.979,91.452 ; v1(85.598,66.167) 85.598,68.834 84.709,69.723 84.709,72.6 84.328,72.981 84.328,90.17 85.979,91.821 R4.1@85.979,92.075 88.773,94.869 88.773,103.759 +5V.4@87.63,104.902 ; R4.1@85.979,92.444 ccw(c85.979,93.335) 86.609,92.705 ccw(c87.239,92.075) R4.1@86.348,92.075 ; R4.1@85.979,92.698 ccw(c85.979,94.202) 87.043,93.139 ccw(c88.106,92.075) R4.1@86.602,92.075 ; +5V.4@87.63,104.279 cw(c87.63,102.775) 88.694,103.838 cw(c89.757,104.902) +5V.4@88.253,104.902 ; +5V.4@87.63,104.533 cw(c87.63,103.642) 88.26,104.272 cw(c88.89,104.902) +5V.4@87.999,104.902
pads on no net: 1.3 7805.0 J1.1 J1.4 J1.6 J1.7 J1.8 J1.9 J1.10 J1.11 K0.2 K1.2 K2.2 K3.2 K4.2 K5.2 K6.2 K7.2 KEY1.2 KEY1.4 U1.7 U1.8 U1.9 U1.10

## Polygon pours and split planes (outlines as drawn)
no net on Top Layer (hatched 45Degree grid 0.508 track 0.203): 36.83,115.951 37.973,117.094 100.076,117.094 100.076,39.37 37.846,39.37 36.83,40.386
no net on Bottom Layer (hatched 45Degree grid 0.508 track 0.203): 36.83,115.951 37.846,116.967 100.076,116.967 100.076,39.37 37.846,39.37 36.957,40.259 36.83,40.386

## Silkscreen, mask and mechanical layers (free items; w line width, h text height)
Top Overlay:
  text "VCC" at 37.592,106.172 h1.02 r270
  text "L" at 163.703,105.156 h1.52 r90
  text "GND" at 37.592,100.457 h1.02 r270
  text "N" at 163.703,99.822 h1.52 r90
  text "PD0" at 37.592,93.345 h1.02 r270
  text "PC0" at 163.703,90.678 h1.02 r90
  text "PD1" at 37.592,87.884 h1.02 r270
  text "MAX232" at 77.47,86.36 h1.02 r270
  text "PC1" at 163.703,85.725 h1.02 r90
  text "PD2" at 37.719,83.058 h1.02 r270
  text "PC2" at 163.703,80.391 h1.02 r90
  text "ATMEGA8/48" at 66.167,79.883 h1.02 r270
  text "PD3" at 37.592,77.978 h1.02 r270
  text "PC3" at 163.703,75.438 h1.02 r90
  text "PD4" at 37.592,72.517 h1.02 r270
  text "PB0" at 163.703,70.231 h1.02 r90
  text "PD5" at 37.592,67.564 h1.02 r270
  text "PB1" at 163.703,65.024 h1.02 r90
  text "PD6" at 37.592,62.611 h1.02 r270
  text "PB2" at 163.576,60.071 h1.02 r90
  text "PD7" at 37.592,57.277 h1.02 r270
  text "PB3" at 163.703,54.991 h1.02 r90
  text "GND" at 37.719,52.705 h1.02 r270
  text "COM" at 163.449,49.657 h1.02 r90
  text "SN:090813" at 141.478,40.64 h1.02
Mechanical 1:
  lines w0.254: 153.416,38.989 163.449,38.989 164.592,40.132 164.592,116.459 163.576,117.475 153.543,117.475 ; 153.924,38.989 149.352,38.989 37.592,38.989 36.449,40.132 36.449,116.332 37.592,117.475 149.352,117.475 153.924,117.475

## Text inside footprints (layer, text, board x,y; h text height)
1: Top Overlay "2" at 69.342,113.411 h1.02; Top Overlay "9" at 83.566,110.871 h1.02; Top Overlay "10" at 83.566,113.411 h1.02
J1: Top Overlay "1" at 73.406,51.816 h1.02; Top Overlay "5" at 61.976,51.689 h1.02; Top Overlay "9" at 64.163,43.837 h1.02 r180; Top Overlay "6" at 72.473,43.837 h1.02 r180